# Altium PCB alir_ali_alizadeh.PcbDoc
Units mm, origin at the board's own origin, x right, y up, seen from the top; angles counter-clockwise.
Board outline 97.17 x 59.69 mm, 2 copper layers (Top Layer, Bottom Layer); 28 components, 23 nets, 114 pads, 22 vias.
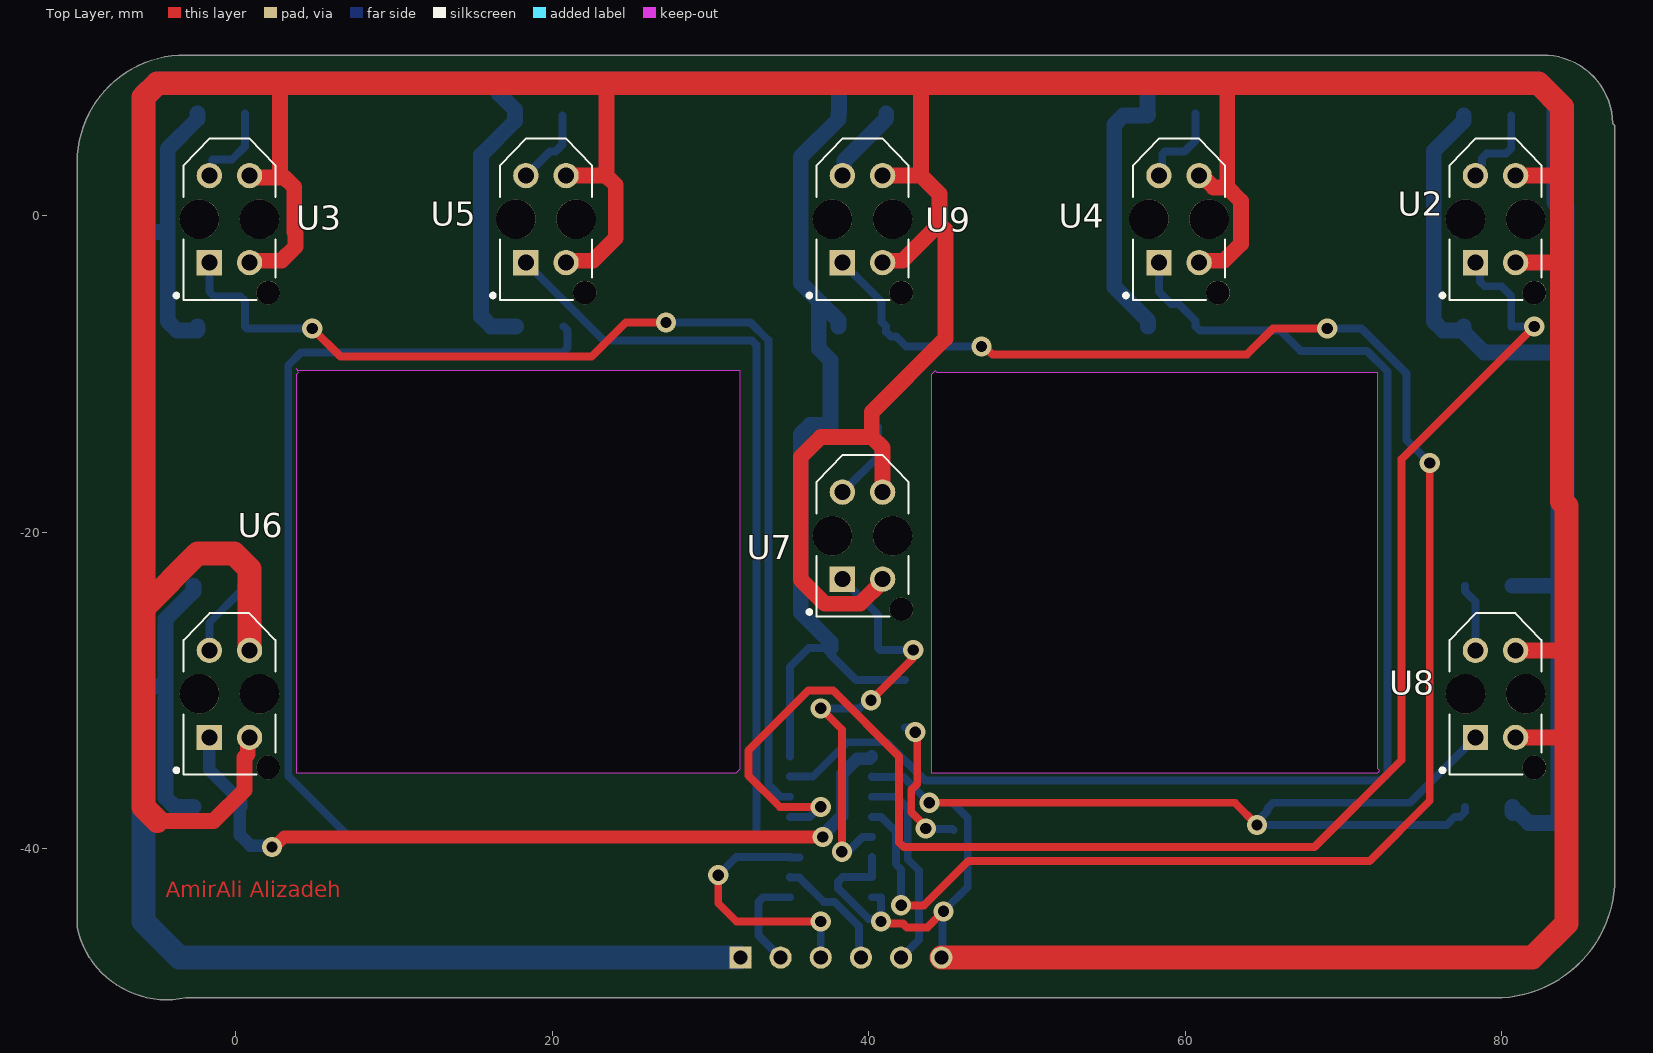
[diagram p0: Top Layer view]
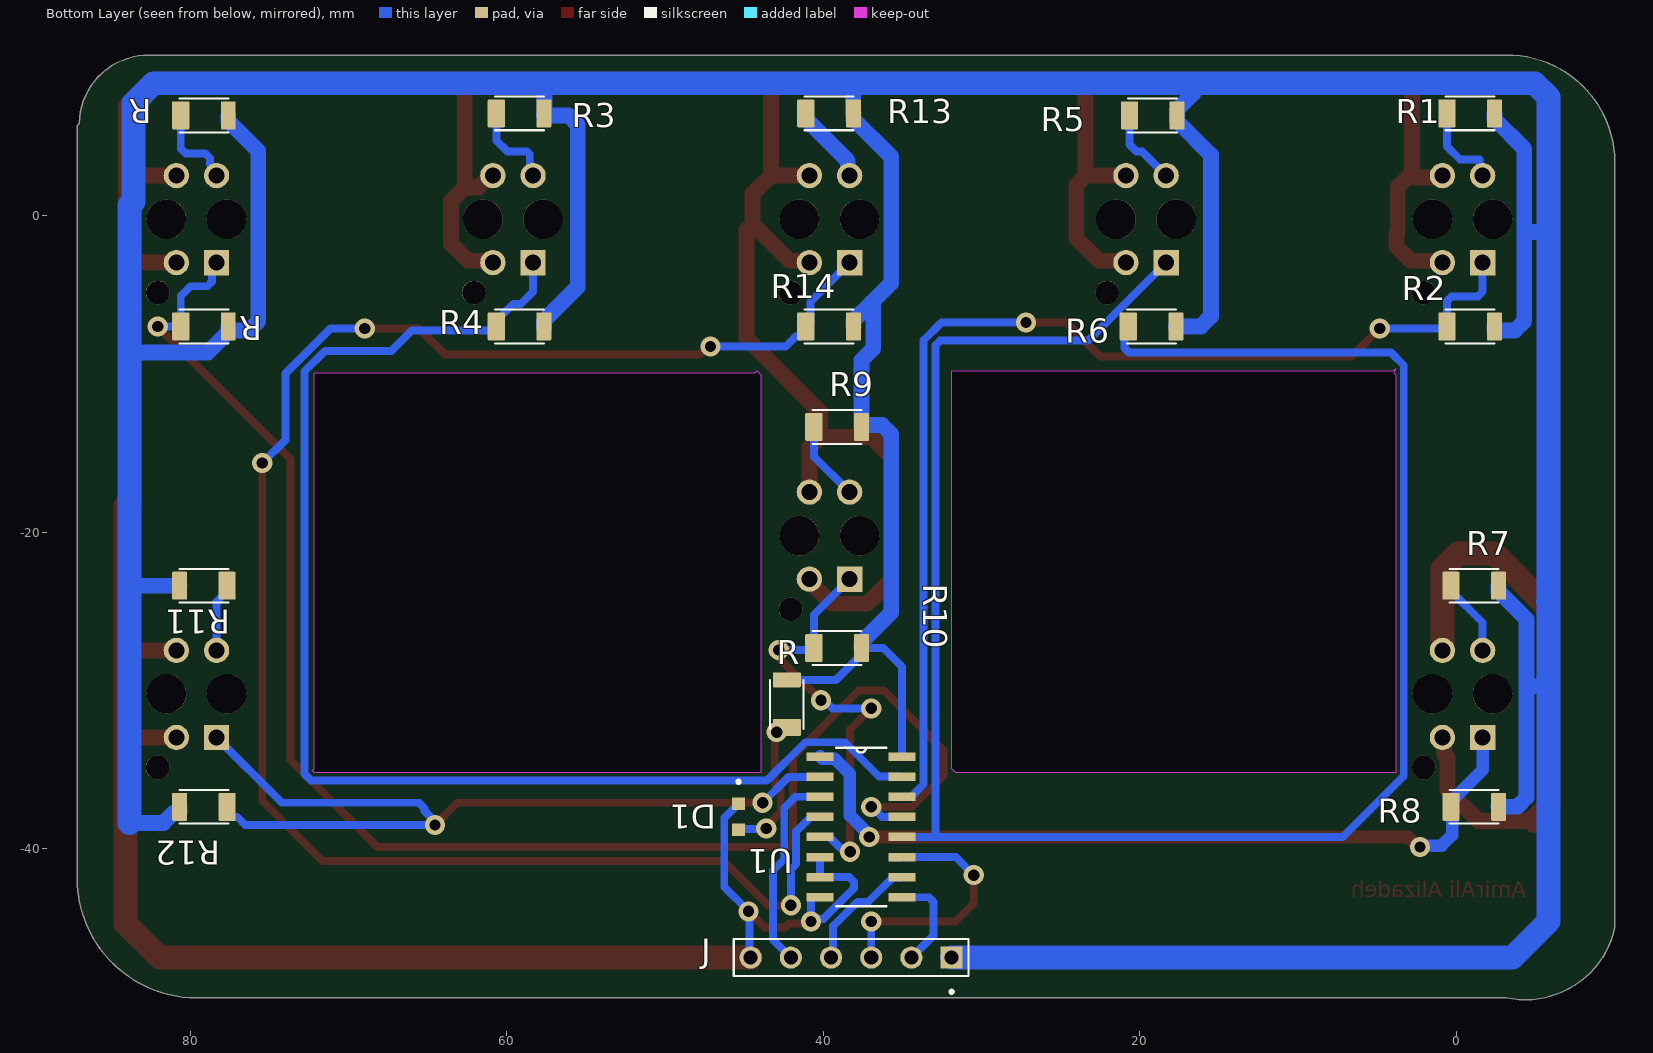
[diagram p1: Bottom Layer view, seen from below]
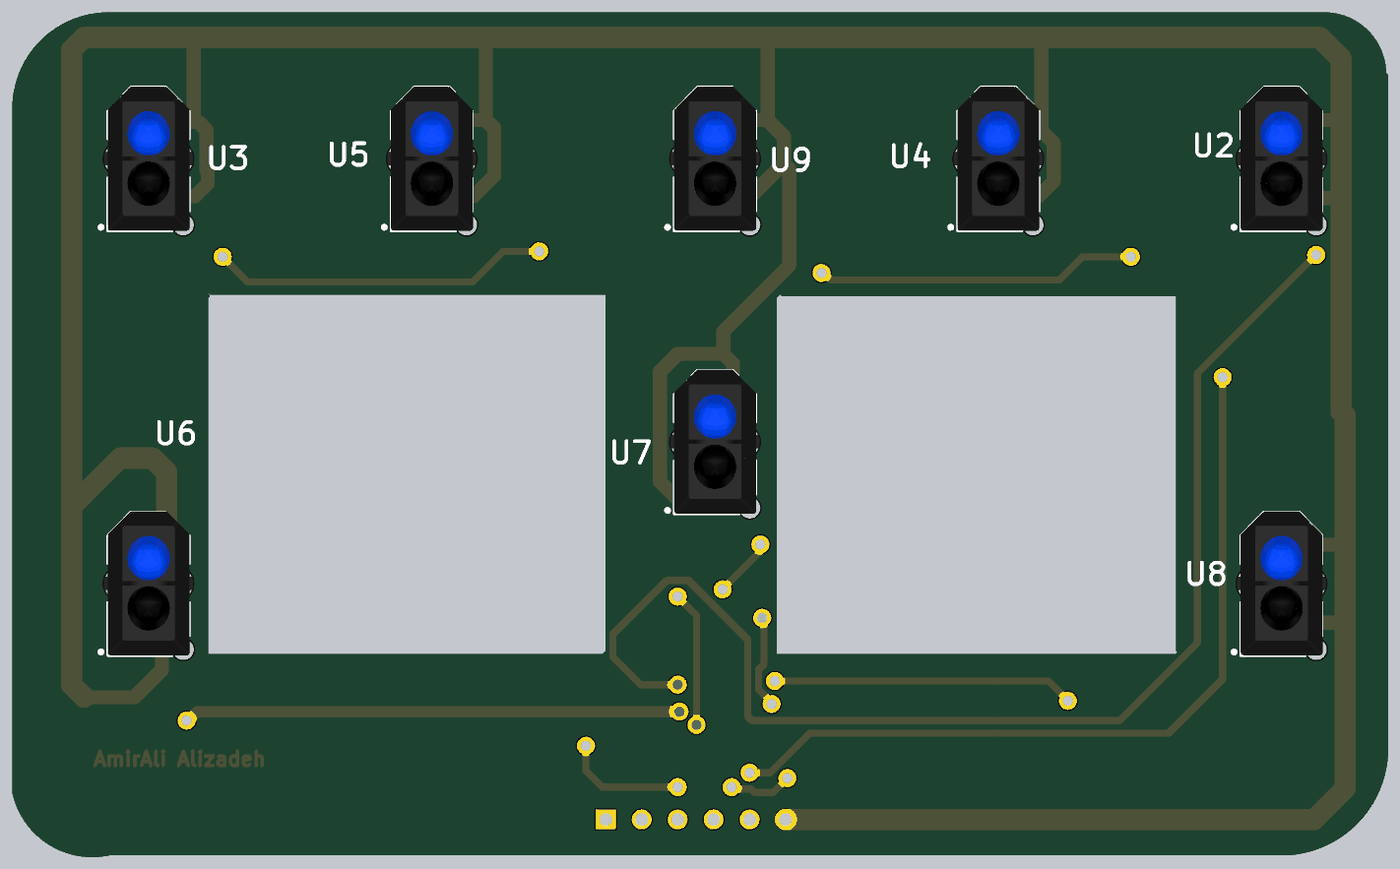
[diagram p2: 3D render of the assembled board from above, using the file's embedded part models]
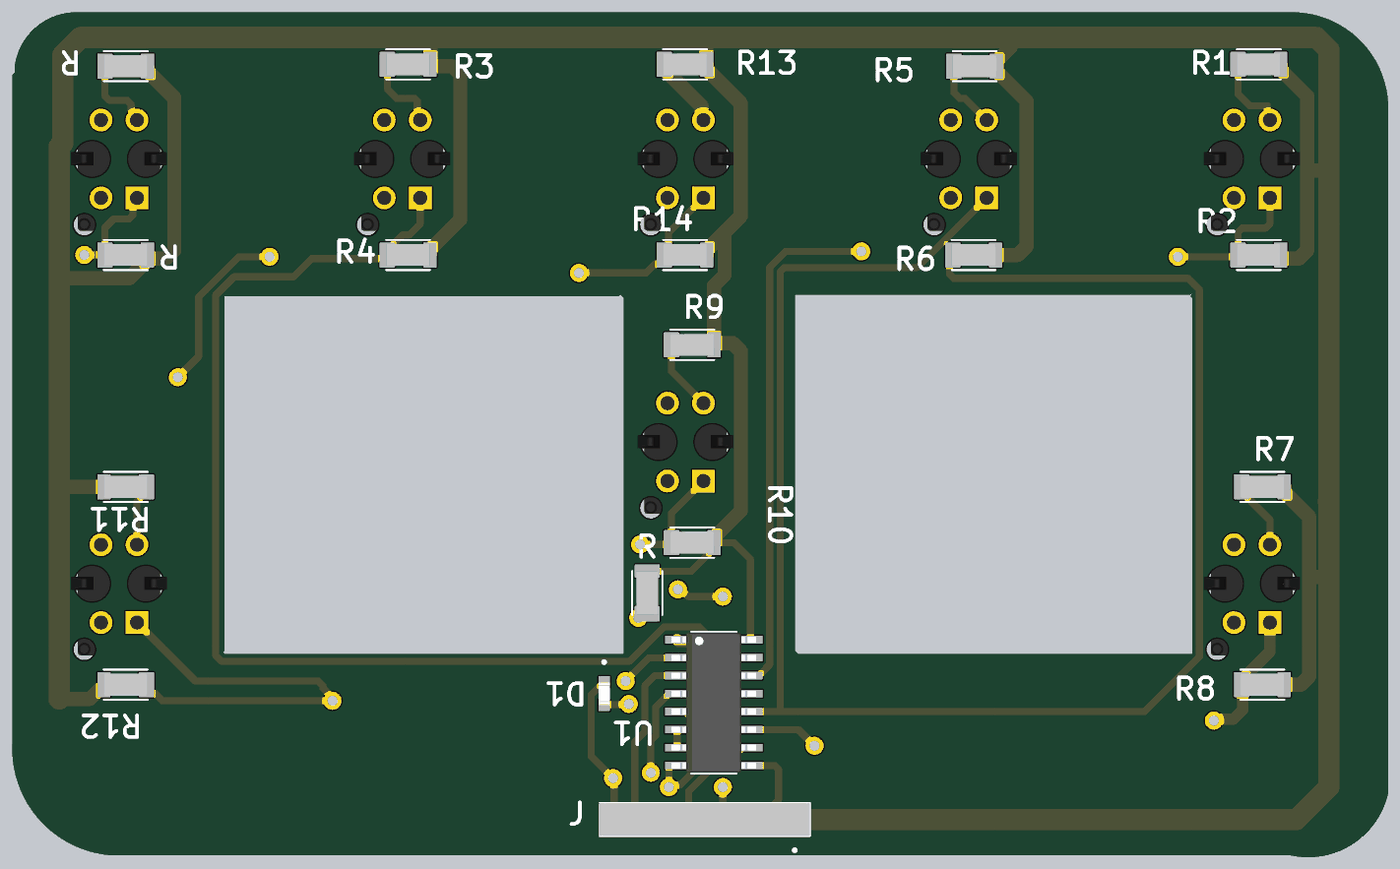
[diagram p3: 3D render of the assembled board from below, using the file's embedded part models]

## Layer stack, top to bottom
Top Solder: solder mask 0.0102, Solder Resist, Dk 3.5
Top Layer: signal copper 0.0356
Dielectric 1: dielectric 0.32, FR-4, Dk 4.8
Bottom Layer: signal copper 0.0356
Bottom Solder: solder mask 0.0102, Solder Resist, Dk 3.5

## Board outline
-10.033,-44.958 -10.033,3.429 cw(c-3.238,3.365) -3.175,10.16 82.55,10.16 cw(c82.614,5.779) 86.995,5.842 87.122,5.715 87.122,-41.402 cw(c79.566,-41.846) 80.01,-49.403 -3.175,-49.403 cw(c-4.381,-43.752)
cut-out: 43.942,-10.033 43.942,-35.179 72.136,-35.179 72.263,-35.052 72.136,-34.925 72.136,-9.906 44.323,-9.906 44.196,-9.779
cut-out: 3.937,-9.906 3.81,-10.033 3.81,-35.179 31.623,-35.179 31.877,-34.925 31.877,-9.779 3.937,-9.779 3.81,-9.652

## Design rules (kind name [scope] priority, off if disabled: settings)
Clearance [All] p1: gap=0.254 ignorepadtopadclearanceinfootprint=FALSE except(0: Arc-Hole Track-Hole SMDPad-Hole THPad-Hole Via-Hole Fill-Hole Poly-Hole Region-Hole Text-Hole)
PolygonConnect [All] p1: connectstyle=Relief reliefconductorwidth=0.254 reliefentries=4 polygonreliefangle="90 Angle" airgapwidth=0.254
RoutingVias [All] p1: holewidth=0.711 width=1.27 viastyle="Through Hole" minholewidth=0.711 minwidth=1.27 maxholewidth=0.711 maxwidth=1.27
SolderMaskExpansion [All] p1: expansion=0.102 istentingtop=FALSE
Width [All] p1: maxlimit=2 minlimit=0.5 preferedwidth=0.8 minimp=50.000000 maximp=50.000000 favimp=50.000000
30 further rules are at their usual default settings.

## Classes and differential pairs
component class ir_sensor_robot1_shematic_trackj_asl: D1 J R R1 R2 R3 R4 R5 R6 R7 R8 R9 R10 R11 R12 R13 R14 U1 U2 U3 U4 U5 U6 U7 U8 U9

## Components (designator, comment, footprint, x,y, rotation, side; value= is the part's Value field where it differs from the comment)
D1 "" LED_KPT-1608ZGC 45.339,-37.973 r270 bottom
J "103321-6" TE_103321-6 38.227,-46.863 r0 bottom
R "" RESC3115X65N 79.121,-6.985 r180 bottom
R "2-1879462-9" RESC3115X65N 42.291,-30.861 r90 bottom
R "" RESC3115X65N 79.121,6.35 r180 bottom
R1 "" RESC3115X65N -0.889,6.477 r180 bottom
R2 "" RESC3115X65N -0.889,-6.985 r180 bottom
R3 "" RESC3115X65N 59.182,6.477 r180 bottom
R4 "" RESC3115X65N 59.182,-6.985 r180 bottom
R5 "" RESC3115X65N 19.177,6.35 r180 bottom
R6 "" RESC3115X65N 19.245,-6.985 r180 bottom
R7 "" RESC3115X65N -1.143,-23.368 r180 bottom
R8 "" RESC3115X65N -1.143,-37.338 r180 bottom
R9 "" RESC3115X65N 39.116,-13.335 r180 bottom
R10 "" RESC3115X65N 39.116,-27.305 r180 bottom
R11 "" RESC3115X65N 79.121,-23.368 r0 bottom
R12 "" RESC3115X65N 79.121,-37.338 r0 bottom
R13 "" RESC3115X65N 39.624,6.477 r180 bottom
R14 "" RESC3115X65N 39.624,-6.985 r180 bottom
U1 "74HC4051D" SOIC127P600X175-16N 37.592,-38.608 r180 bottom
U2 "TCRT500" TCRT5000 80,0 r90 top
U3 "TCRT500" TCRT5000 0,0 r90 top
U4 "TCRT500" TCRT5000 60,0 r90 top
U5 "TCRT500" TCRT5000 20,0 r90 top
U6 "TCRT500" TCRT5000 0,-30 r90 top
U7 "TCRT500" TCRT5000 40,-20 r90 top
U8 "TCRT500" TCRT5000 80,-30 r90 top
U9 "TCRT500" TCRT5000 40,0 r90 top

## Footprints (in the part's own frame and the unit in brackets; to place one, negate y for a bottom-side part, rotate by r counter-clockwise, add the part's x,y. Pads: shape width x height; smd on the part's side, far side on the other; paste and mask are expansions set on the pad)
LED_KPT-1608ZGC [mm]
  rect 0.8x0.8 smd: 1(0.825,0) 2(-0.825,0)
  silkscreen extent -2.32,-0.1 -2.13,0.1, body extent -0.8,-0.4 0.8,0.4, height 1.1
RESC3115X65N [mm]
  rrect14% 1.09x1.77 smd: 1(-1.465,0)
  rrect14% 0.94x1.77 smd: 2(1.54,0)
  silkscreen extent -1.55,-1.06 1.55,1.06, body extent -1.55,-0.77 1.55,0.77, height 0.56
SOIC127P600X175-16N [mil]
  rect 67x21 smd: 1(-102,175) 2(-102,125) 3(-102,75) 4(-102,25) 5(-102,-25) 6(-102,-75) 7(-102,-125) 8(-102,-175) 9(102,-175) 10(102,-125) 11(102,-75) 12(102,-25) 13(102,25) 14(102,75) 15(102,125) 16(102,175)
  silkscreen extent -62,-197 62,197, body extent -118,-195 118,195, height 69
TCRT5000 [mm]
  round 1.6 hole 1: A(2.547,1.676) E(-2.953,-0.864) K(2.547,-0.864)
  rect 1.6x1.6 hole 1: C(-2.953,1.676)
  round 1.5 hole 1.5 unplated: None(-4.853,-2.044)
  round 2.5 hole 2.5 unplated: None(-0.203,2.306) None(-0.203,-1.494)
  silkscreen extent -5.3,-2.49 4.9,3.88, body extent -5.27,-3 4.93,3.8, height 7.2
TE_103321-6 [mm]
  rect 1.398x1.398 hole 0.89: 1(-6.35,0)
  round 1.398 hole 0.89: 2(-3.81,0) 3(-1.27,0) 4(1.27,0) 5(3.81,0) 6(6.35,0)
  silkscreen extent -7.42,-1.17 7.42,2.27, body extent -7.42,-1.17 7.42,1.17, height 10.58

## Part data
D1: library part KPT-1608ZGC, "1.6x0.8mm Smd Chip Led Lamp", Package="0603 Kingbright", Availability="In Stock", Check_prices=https://www.snapeda.com/parts/KPT-1608ZGC/Kingbright/view-part/?ref=eda, MF=Kingbright, MP=KPT-1608ZGC, Price=None, SnapEDA_Link=https://www.snapeda.com/parts/KPT-1608ZGC/Kingbright/view-part/?ref=snap
J: "Pin 06 MODII HDR SRST B / A .100CL 6 POS", Package=None, Availability=Unavailable, MF="TE Connectivity", Mouser-Purchase-URL=https://snapeda.com/shop?store=Mouser&id=4238467, MP=103321-6, Price=None, SnapEDA_Link=https://www.snapeda.com/parts/103321-6/TE%20Connectivity/view-part/4238467/?ref=snap
R R R1 R2 R3 R4 R5 R6 R7 R8 R9 R10 R11 R12 R13 R14: library part 2-1879462-9, "RES 0.24 OHM 1% 1/4W 1206", Package=1206, Power_Rating=".25 W", Resistance=24, Tolerance=1%, Availability=Unavailable, EU_RoHS_Compliance="Compliant with Exemptions", MF="TE Connectivity", MP=2-1879462-9, Price=None, SnapEDA_Link=https://www.snapeda.com/parts/2-1879462-9/TE%20Connectivity/view-part/2213899/?ref=snap
R: "RES 0.24 OHM 1% 1/4W 1206", Package=1206, Power_Rating=".25 W", Resistance=24, Tolerance=1%, Availability=Unavailable, EU_RoHS_Compliance="Compliant with Exemptions", MF="TE Connectivity", MP=2-1879462-9, Price=None, SnapEDA_Link=https://www.snapeda.com/parts/2-1879462-9/TE%20Connectivity/view-part/2213899/?ref=snap
U1: "1 Circuit IC Switch 8:1 130Ohm 16-SOIC", Package="SOIC-16 Toshiba", Availability="In Stock", Check_prices=https://www.snapeda.com/parts/74HC4051D/Toshiba/view-part/?ref=eda, MF=Toshiba, MP=74HC4051D, Price=None, Purchase-URL=https://pricing.snapeda.com/search/part/74HC4051D/?ref=eda, SnapEDA_Link=https://www.snapeda.com/parts/74HC4051D/Toshiba/view-part/?ref=snap
U2 U3 U4 U5 U6 U7 U8 U9: library part TCRT5000

## Via types
v1: diameter 1.27, hole 0.711, Top Layer to Bottom Layer, 22 vias

## Nets (pads, with @x,y where several pads share a name; then routed paths per layer and width w, separated by ;. In a path a pad name is that pad's centre, name@x,y a point inside that pad or via, vN(x,y) a via of type N, cw(c..) or ccw(c..) an arc to the next point about the centre after c; other vN are vias at no path point)
+5: J.1 R1.2 R2.2 R3.2 R4.2 R5.2 R6.2 R7.2 R8.2 R9.2 R10.2 R11.2 R12.2 R13.2 R14.2 R.2 U1.16 | length 385.7
  Bottom Layer w0.5: U1.16 35.001,-28.499 36.195,-27.305 R10.2 37.576,-27.72 39.177,-29.321 R.2@42.291,-29.321
  Bottom Layer w1: -5.842,-29.718 -4.445,-29.718 ; -5.842,-24.384 -5.546,-24.384 ; -5.842,-1.397 -5.461,-1.016 -4.31,-1.016 ; R8.2 -3.859,-37.338 -4.445,-36.752 -4.445,-29.718 ; R7.2 -2.683,-23.723 -4.445,-25.485 -4.445,-29.718 ; R2.2 -2.429,-7.209 -2.459,-7.239 -3.725,-7.239 -4.31,-6.653 -4.31,-1.016 ; R1.2 -2.429,6.122 -4.31,4.241 -4.31,-1.016 ; 16.632,8.382 16.632,7.71 17.637,6.705 R5.2 17.637,5.995 15.494,3.852 15.494,-6.35 16.129,-6.985 R6.2 ; R10.2 37.576,-26.95 35.687,-25.061 35.687,-13.794 36.273,-13.208 37.546,-13.208 R9.2@37.576,-13.238 ; R9.2 R9.2@37.576,-13.238 ; R14.2 38.084,-6.63 36.936,-5.482 ; 38.227,8.382 38.114,8.269 38.114,6.507 R13.2 38.084,6.122 35.69,3.728 35.69,-4.236 36.936,-5.482 ; 57.277,8.382 57.612,8.047 57.612,6.507 R3.2 57.642,6.38 57.612,6.35 56.085,6.35 55.499,5.764 55.499,-4.487 57.642,-6.63 R4.2 ; R.2@77.581,-6.985 R.2@77.581,-7.209 ; R.2@77.581,6.35 77.581,5.995 75.69,4.104 75.69,-6.653 76.275,-7.239 77.551,-7.239 R.2@77.581,-7.209 ; R12.2 80.661,-37.693 80.691,-37.723 81.046,-37.723 81.677,-38.354 83.82,-38.354 ; R11.2 83.82,-23.368 ; 83.82,-8.636 78.877,-8.636 77.581,-7.34 R.2@77.581,-7.209 ; 36.936,-5.482 36.83,-5.588 36.83,-8.382 37.576,-9.128 R9.2@37.576,-13.238
  Bottom Layer w1.5: J.1 -3.556,-46.863 -5.842,-44.577 -5.842,-29.718 -5.842,-24.384 -5.842,-1.397 -5.842,7.503 -4.963,8.382 16.632,8.382 38.227,8.382 57.277,8.382 82.296,8.382 83.566,7.112 83.566,0.912 83.82,0.658 83.82,-8.636 83.82,-23.368 83.82,-38.354
GND: D1.2 J.6 U1.6 U1.7 U1.8 U2.E U2.K U3.E U3.K U4.E U4.K U5.E U5.K U6.E U6.K U7.E U7.K U8.E U8.K U9.E U9.K | length 393.5
  Top Layer w0.5: v1(40.767,-44.577) 40.905,-44.715 42.152,-44.715 42.395,-44.958 43.688,-44.958 v1(44.704,-43.942)
  Top Layer w1: -4.963,-38.227 -1.397,-38.227 0.54,-36.29 0.54,-34.23 0.749,-34.021 0.749,-33.068 U6.E ; U3.E 0.978,-2.838 2.877,-2.838 3.777,-1.938 3.777,-1.11 3.683,-1.016 3.683,1.827 3.097,2.413 2.794,2.413 ; U3.K 0.978,2.432 2.775,2.432 2.794,2.413 ; 2.667,8.382 2.794,8.255 2.794,2.413 ; U5.E 20.978,-2.838 22.562,-2.838 24.003,-1.397 24.003,1.954 23.41,2.547 ; U5.K 23.41,2.547 ; 23.495,8.382 23.41,8.297 23.41,2.547 ; U7.E 40.864,-23.08 39.436,-24.507 37.211,-24.507 35.69,-22.986 35.69,-15.237 36.957,-13.97 40.181,-13.97 ; U7.K 40.864,-14.652 40.181,-13.97 ; U9.K 43.3,2.547 ; U9.E@41.026,-2.953 U9.E 40.978,-2.838 42.12,-2.838 44.45,-0.508 ; 43.688,8.382 43.3,7.994 43.3,2.547 ; U4.E 60.978,-2.838 62.44,-2.838 63.5,-1.778 63.5,0.938 62.637,1.801 ; U4.K 61.026,2.547 61.772,1.801 62.637,1.801 ; 62.611,8.382 62.637,8.356 62.637,1.801 ; U8.E 83.633,-32.953 84.074,-32.512 ; U8.K 83.968,-27.453 84.074,-27.559 ; U2.E 83.703,-2.953 83.798,-3.048 ; U2.K 83.791,2.547 83.798,2.54 ; 40.181,-13.97 40.181,-12.397 44.831,-7.747 44.831,-0.889 44.45,-0.508 ; 43.3,2.547 44.45,1.397 44.45,-0.508
  Top Layer w1.5: -4.963,-38.227 -5.842,-37.348 -5.842,-24.765 ; U6.K 0.864,-22.316 -0.117,-21.336 -2.413,-21.336 -5.842,-24.765 ; J.6 81.915,-46.863 84.074,-44.704 84.074,-32.512 84.074,-27.559 84.074,-18.328 83.798,-18.052 83.798,-3.048 83.798,2.54 83.798,6.88 82.296,8.382 62.611,8.382 43.688,8.382 23.495,8.382 2.667,8.382 -4.963,8.382 -5.842,7.503 -5.842,-24.765
  Bottom Layer w0.5: U1.8 40.75,-43.053 40.767,-43.07 v1(40.767,-44.577) 40.62,-44.43 39.985,-44.43 38.045,-42.49 38.045,-42.076 38.338,-41.783 U1.7 U1.6 ; J.6 44.64,-46.799 44.64,-44.005 v1(44.704,-43.942) 46.243,-42.403 46.243,-38.052 D1.2
NetD1_1: D1.1 R.1@42.291,-32.326 | length 9.2
  Top Layer w0.5: v1(42.926,-32.621) 43.053,-32.748 43.053,-35.902 42.676,-36.279 42.676,-37.661 43.591,-38.577 v1(43.591,-38.705)
  Bottom Layer w0.5: R.1@42.291,-32.326 42.631,-32.326 v1(42.926,-32.621) ; v1(43.591,-38.705) 43.638,-38.751 45.292,-38.751 D1.1
NetR1_1: R1.1 U3.A | length 5.6
  Bottom Layer w0.5: U3.A -1.485,2.738 -1.485,3.556 -0.254,3.556 0.576,4.386 R1.1
NetR3_1: R3.1 U4.A | length 5.6
  Bottom Layer w0.5: U4.A 58.534,2.757 58.534,3.885 58.713,4.064 59.944,4.064 60.647,4.767 R3.1
NetR5_1: R5.1 U5.A | length 5
  Bottom Layer w0.5: U5.A 19.841,4.064 20.193,4.064 20.642,4.513 R5.1
NetR7_1: R7.1 U6.A | length 4.9
  Bottom Layer w0.5: U6.A -1.676,-25.706 0.322,-23.708 R7.1
NetR9_1: R9.1 U7.A | length 5.1
  Bottom Layer w0.5: U7.A 40.581,-15.196 R9.1
NetR11_1: R11.1 U8.A | length 4.4
  Bottom Layer w0.5: R11.1 77.656,-23.708 78.324,-24.376 U8.A
NetR13_1: R13.1 U9.A | length 5.1
  Bottom Layer w1: U9.A 38.438,2.662 38.438,3.486 41.089,6.137 R13.1
NetR_1: R.1@80.586,6.35 U2.A | length 5.5
  Bottom Layer w0.5: U2.A 78.324,2.844 78.74,3.261 78.74,3.644 79.033,3.937 80.264,3.937 80.586,4.259 R.1@80.586,6.35
out: J.5 U1.3 | length 12.8
  Bottom Layer w0.5: U1.3 41.744,-36.703 42.452,-37.411 42.452,-40.647 43.176,-41.371 43.176,-45.724 J.5
S1: J.4 U1.10 | length 7.7
  Bottom Layer w0.5: U1.10 35.018,-41.8 35.602,-41.8 37.143,-43.341 37.829,-43.341 39.37,-44.881 39.37,-46.736 J.4
S2: J.2 U1.9 | length 6.2
  Bottom Layer w0.5: J.2 33.02,-45.466 33.02,-43.346 33.313,-43.053 U1.9
S3: J.3 U1.11 | length 16.6
  Top Layer w0.5: v1(30.48,-41.656) 30.48,-43.434 31.623,-44.577 v1(36.957,-44.577)
  Bottom Layer w0.5: v1(30.48,-41.656) 31.623,-40.513 U1.11 35.018,-40.53 U1.11@35.602,-40.53 ; J.3 v1(36.957,-44.577)
Y0: R.1@80.586,-6.985 U1.13 U2.C | length 99.5
  Top Layer w0.5: v1(36.957,-37.338) 34.366,-37.338 32.381,-35.353 32.381,-33.782 36.187,-29.976 37.723,-29.976 41.906,-34.159 41.906,-39.581 42.199,-39.874 68.154,-39.874 73.66,-34.368 73.66,-15.367 v1(82.042,-6.985)
  Bottom Layer w0.5: U1.13 36.279,-37.973 36.914,-37.338 v1(36.957,-37.338) ; U2.C 78.613,-3.243 78.613,-4.152 78.906,-4.445 79.971,-4.445 80.586,-5.06 80.586,-6.985 v1(82.042,-6.985)
Y1: R2.1 U1.14 U3.C | length 70.9
  Top Layer w0.5: v1(4.826,-7.112) 6.604,-8.89 22.479,-8.89 24.638,-6.731 v1(27.178,-6.731)
  Bottom Layer w0.5: U3.C -1.676,-4.787 -1.384,-5.08 0.283,-5.08 0.576,-5.373 R2.1 0.703,-7.112 v1(4.826,-7.112) ; v1(27.178,-6.731) 32.523,-6.731 33.646,-7.855 33.646,-35.908 33.901,-36.163 33.901,-36.187 34.417,-36.703 U1.14
Y2: R4.1 U1.15 U4.C | length 83.8
  Bottom Layer w0.5: U1.15 36.449,-35.433 38.623,-33.259 41.126,-33.259 43.55,-35.683 72.345,-35.683 72.767,-35.261 72.767,-9.824 71.474,-8.532 67.282,-8.532 65.99,-7.239 60.901,-7.239 R4.1 60.647,-6.645 59.571,-5.569 59.105,-5.569 58.324,-4.787 U4.C
Y3: R6.1 U1.12 U5.C | length 126.6
  Bottom Layer w0.5: U5.C 23.244,-7.874 32.599,-7.874 32.892,-8.167 32.892,-39.243 ; R6.1 20.955,-7.23 20.955,-8.343 20.662,-8.636 4.113,-8.636 3.306,-9.443 3.306,-35.388 7.161,-39.243 32.892,-39.243 ; U1.12 32.892,-39.243
Y4: R8.1 U1.1 U6.C | length 51.2
  Top Layer w0.8: v1(2.286,-39.878) 2.413,-39.878 3.048,-39.243 v1(37.084,-39.243)
  Bottom Layer w0.8: U6.C -1.676,-35 0.322,-36.998 R8.1 0.254,-37.406 0.254,-39.116 0.926,-39.788 2.196,-39.788 v1(2.286,-39.878) ; v1(37.084,-39.243) 37.084,-39.116 38.305,-37.895 38.305,-35.268 39.277,-34.296 40.049,-34.296 U1.1
Y5: R10.1 U1.5 U7.C | length 27.1
  Top Layer w0.5: v1(36.957,-31.115) 38.287,-32.445 v1(38.287,-40.179) ; v1(40.132,-30.607) 42.799,-27.94 v1(42.799,-27.432)
  Bottom Layer w0.5: v1(36.957,-31.115) 39.416,-31.115 39.924,-30.607 v1(40.132,-30.607) ; v1(38.287,-40.179) 38.434,-40.031 38.81,-40.031 39.599,-39.243 U1.5 ; U7.C 40.581,-25.211 R10.1 40.708,-27.432 v1(42.799,-27.432)
Y6: R12.1 U1.2 U8.C | length 55.7
  Top Layer w0.5: v1(43.815,-37.084) 63.119,-37.084 v1(64.516,-38.481)
  Bottom Layer w0.5: U1.2 40.2,-35.45 42.181,-35.45 v1(43.815,-37.084) ; R12.1 77.656,-37.678 77.361,-37.973 77.021,-37.973 76.513,-38.481 v1(64.516,-38.481) 64.516,-38.273 65.178,-37.61 65.178,-37.438 65.532,-37.084 74.193,-37.084 U8.C
Y7: R14.1 U1.4 U9.C | length 111.3
  Top Layer w0.5: v1(42.037,-43.561) 43.474,-43.561 46.278,-40.757 71.638,-40.757 75.438,-36.957 v1(75.438,-15.621) ; v1(47.117,-8.255) 47.287,-8.255 47.795,-8.763 63.881,-8.763 65.532,-7.112 v1(68.961,-7.112)
  Bottom Layer w0.5: U9.C 40.794,-5.424 40.794,-6.69 R14.1 41.089,-7.325 41.384,-7.62 41.724,-7.62 42.359,-8.255 v1(47.117,-8.255) ; U1.4 40.767,-37.973 41.698,-38.904 41.698,-40.959 42.037,-41.298 v1(42.037,-43.561) ; v1(68.961,-7.112) 71.121,-7.112 73.974,-9.965 73.974,-14.157 v1(75.438,-15.621)
pads on no net: U2.None U3.None U4.None U5.None U6.None U7.None U8.None U9.None

## Other copper
Top Layer:
  text "AmirAli Alizadeh" at -4.445,-43.053 h1

## Silkscreen, mask and mechanical layers (free items; w line width, h text height)
Mechanical 13:
  lines w0.254: 86.995,5.842 ccw(c82.614,5.779) 82.55,10.16 -3.175,10.16 ccw(c-3.238,3.365) -10.033,3.429 -10.033,-42.164 -10.033,-44.958 ccw(c-4.381,-43.752) -3.175,-49.403 77.216,-49.403 78.105,-49.403 80.01,-49.403 ccw(c79.566,-41.846) 87.122,-41.402 87.122,5.715 ; 44.069,-35.179 44.196,-35.052 72.009,-35.052 72.009,-9.779 70.485,-9.779 44.069,-9.779 44.069,-35.179